# EAGLE board main_board (EAGLE 5.11)
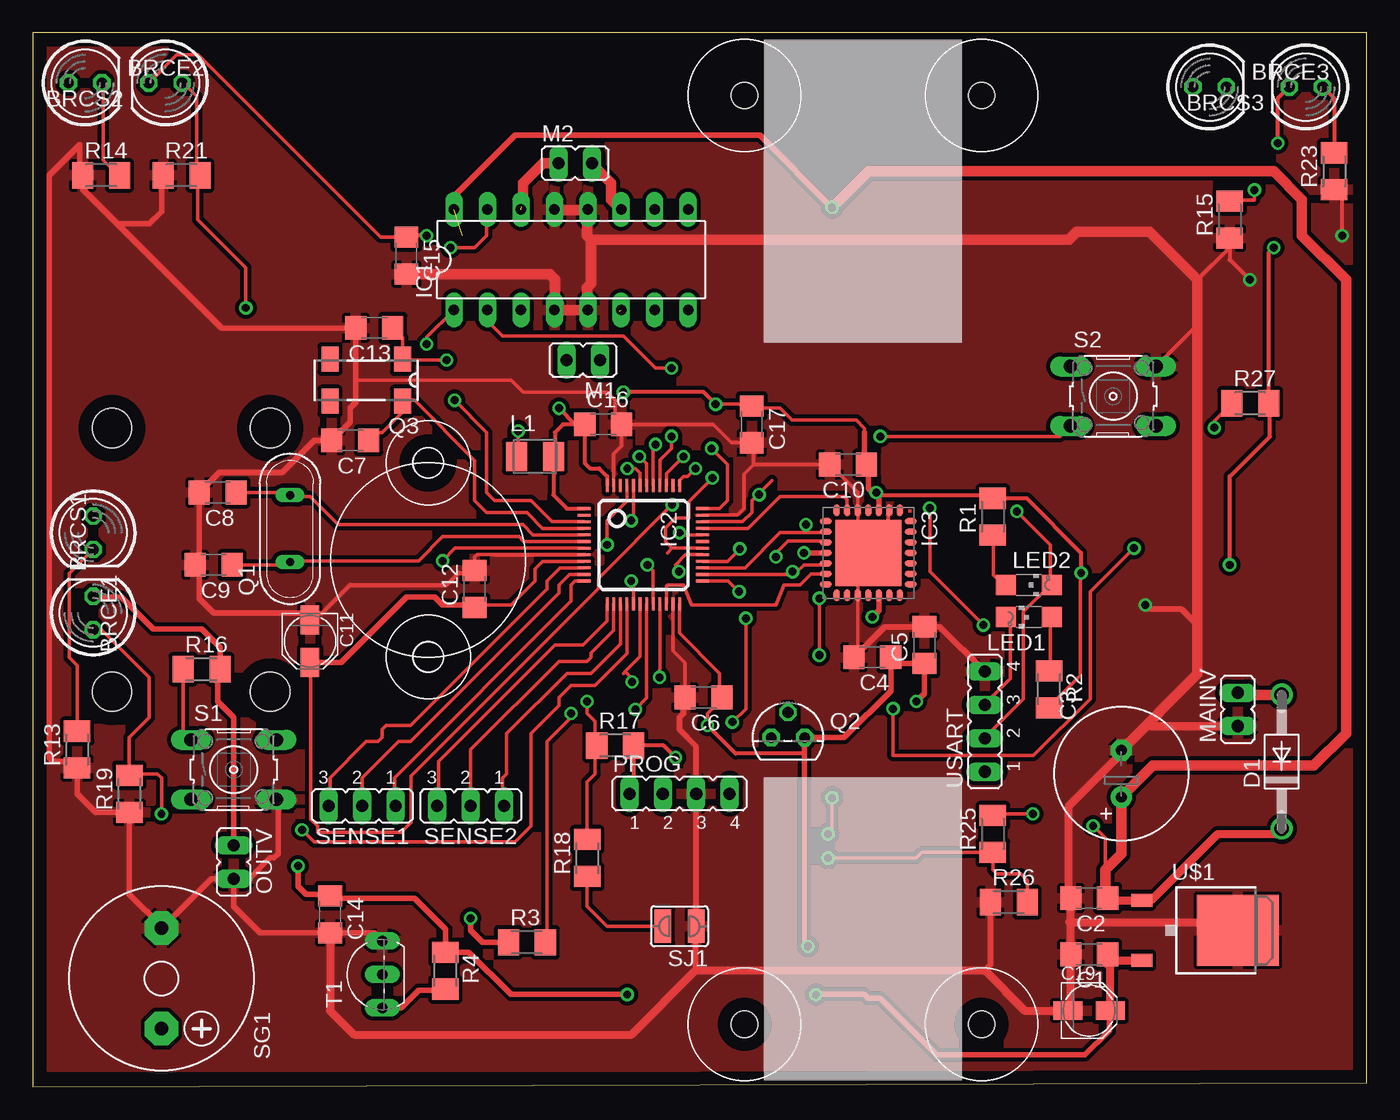
[diagram p0: board, top side]
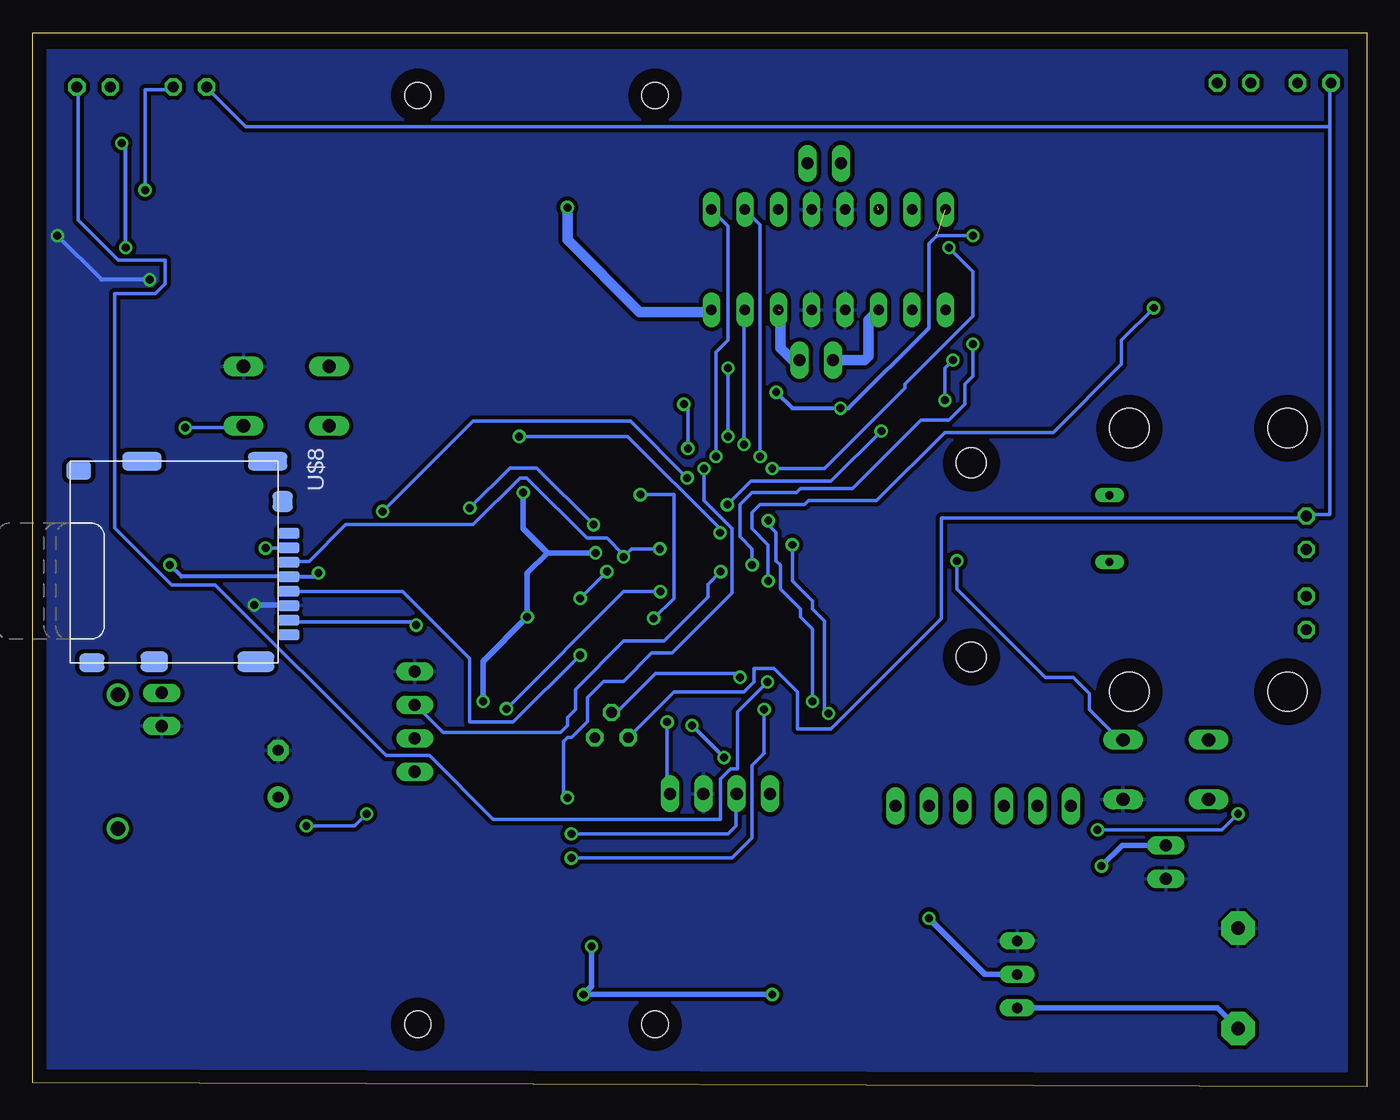
[diagram p1: board, bottom side, seen from below]

Size 101.22 x 80 mm. Coordinates in mm from the lower left corner, seen from the top.
Outline: 0,0 101.22,0.3 101.22,80 0,80 0,0
Copper layers (1*16): Top 0.035mm / dielectric 1.5mm / Bottom 0.035mm
Design rules "default *": minimum track width 10mil, minimum drill 24mil, track to track 10mil, track to pad 10mil, pad to pad 10mil, via to via 10mil, smd to smd 8mil, copper to edge 40mil, drill to drill 8mil, minimum pad ring 10mil, minimum via ring 8mil, stop-mask expansion 4mil, vias tented up to drill 0mil, thermal gap 10mil
Holes 3 mm at 6,50 18,50 6,30 18,30

## Footprints (pad centres in the part's own frame; a part is rotated, then mirrored left to right if it is on the bottom)
LED5MM = drill 0.813 octagon: A -1.27,0; K 1.27,0
C1206 = smd 1.6 x 1.8: 1 -1.4,0; 2 1.4,0
E3,5-10 = drill 0.813 pad 1.6 round: + -1.778,0 | drill 0.813 pad 1.6 octagon: - 1.778,0
PANASONIC_B = smd 2.2 x 1.4: + 1.6,0; - -1.6,0
DO41-10 = drill 1.118 round: A 5.08,0; C -5.08,0
DIL16 = drill 0.813 long: 1 -8.89,-3.81; 2 -6.35,-3.81; 3 -3.81,-3.81; 4 -1.27,-3.81; 5 1.27,-3.81; 6 3.81,-3.81; 7 6.35,-3.81; 8 8.89,-3.81; 9 8.89,3.81; 10 6.35,3.81; 11 3.81,3.81; 12 1.27,3.81; 13 -1.27,3.81; 14 -3.81,3.81; 15 -6.35,3.81; 16 -8.89,3.81
TQFP48 = smd 0.2 x 1: 1 -2.75,-4.5; 2 -2.25,-4.5; 3 -1.75,-4.5; 4 -1.25,-4.5; 5 -0.75,-4.5; 6 -0.25,-4.5; 7 0.25,-4.5; 8 0.75,-4.5; 9 1.25,-4.5; 10 1.75,-4.5; 11 2.25,-4.5; 12 2.75,-4.5; 25 2.75,4.5; 26 2.25,4.5; 27 1.75,4.5; 28 1.25,4.5; 29 0.75,4.5; 30 0.25,4.5; 31 -0.25,4.5; 32 -0.75,4.5; 33 -1.25,4.5; 34 -1.75,4.5; 35 -2.25,4.5; 36 -2.75,4.5 | smd 1 x 0.2: 13 4.5,-2.75; 14 4.5,-2.25; 15 4.5,-1.75; 16 4.5,-1.25; 17 4.5,-0.75; 18 4.5,-0.25; 19 4.5,0.25; 20 4.5,0.75; 21 4.5,1.25; 22 4.5,1.75; 23 4.5,2.25; 24 4.5,2.75; 37 -4.5,2.75; 38 -4.5,2.25; 39 -4.5,1.75; 40 -4.5,1.25; 41 -4.5,0.75; 42 -4.5,0.25; 43 -4.5,-0.25; 44 -4.5,-0.75; 45 -4.5,-1.25; 46 -4.5,-1.75; 47 -4.5,-2.25; 48 -4.5,-2.75
QFPN-28 = smd 0.9 x 0.45: 1 -3.225,2.4; 2 -3.225,1.6; 3 -3.225,0.8; 4 -3.225,0; 5 -3.225,-0.8; 6 -3.225,-1.6; 7 -3.225,-2.4; 15 3.225,-2.4; 16 3.225,-1.6; 17 3.225,-0.8; 18 3.225,0; 19 3.225,0.8; 20 3.225,1.6; 21 3.225,2.4 | smd 0.45 x 0.9: 8 -2.4,-3.225; 9 -1.6,-3.225; 10 -0.8,-3.225; 11 0,-3.225; 12 0.8,-3.225; 13 1.6,-3.225; 14 2.4,-3.225; 22 2.4,3.225; 23 1.6,3.225; 24 0.8,3.225; 25 0,3.225; 26 -0.8,3.225; 27 -1.6,3.225; 28 -2.4,3.225 | smd 5 x 5: TH 0,0
L3230M = smd 1.6 x 2.2: 1 -1.4,0; 2 1.4,0
CHIPLED_1206 = smd 1.5 x 1.5: A 0,-1.75; C 0,1.75
JP1 = drill 0.914 long: 1 0,-1.27; 2 0,1.27
JP4 = drill 0.914 long: 1 -3.81,0; 2 -1.27,0; 3 1.27,0; 4 3.81,0
QS = drill 0.61 long: 1 -2.54,0; 2 2.54,0
TO92 = drill 0.813 octagon: 1 1.27,0; 2 0,1.905; 3 -1.27,0
MC-306 = smd 1.3 x 1.9: 1 -2.75,-1.6; 2 2.75,-1.6; 3 2.75,1.6; 4 -2.75,1.6
M1206 = smd 1.6 x 2: 1 -1.4,0; 2 1.4,0
B3F-10XX = drill 1.016 long: 1 -3.251,2.261; 2 3.251,2.261; 3 -3.251,-2.261; 4 3.251,-2.261
JP2 = drill 0.914 long: 1 -2.54,0; 2 0,0; 3 2.54,0
F/CM12P = drill 1.016 pad 2.54 octagon: + 3.81,0; - -3.81,0
SJW = smd 1.27 x 2.54: 1 -1.27,0; 2 1.27,0
TO92-CBE = drill 0.813 long: B 0,0; C -2.54,0; E 2.54,0
DPAK = smd 1 x 1.6: 1 -2.28,-6.07; 3 2.28,-6.07 | smd 5.4 x 6.2: 2 0,1.23
MICRO_SD_CONNECTOR = smd 0.8 x 1.6: 1 -2.03,8.2; 2 -0.93,8.2; 3 0.17,8.2; 4 1.27,8.2; 5 2.37,8.2; 6 3.47,8.2; 7 4.57,8.2; 8 5.67,8.2 | smd 1.55 x 2.8: 9 7.735,5.7 | smd 1.55 x 2.1: 10 7.735,-2 | smd 1.4 x 1.9: 11 7.81,-6.75; 12 -6.79,-7.75 | smd 1.4 x 3: 13 -7.49,-2.95; 14 -7.49,6.6 | smd 1.6 x 1.55: 15 -4.43,7.725
BALLB = hole 2.286: -7.366,0; 7.366,0
MOTORB = hole 2: -9,7.25; 9,7.25

## Placement (x,y rotation side)
BRCE1  [LED5MM]  4.57,42.06 270 top
BRCE2  [LED5MM]  3.96,76.2 0 top
BRCE3  [LED5MM]  89.31,75.9 0 top
BRCS1  [LED5MM]  4.57,35.97 90 top
BRCS2  [LED5MM]  10.06,76.2 180 top
BRCS3  [LED5MM]  96.62,75.9 180 top
C1  100n  [C1206]  80.16,10.06 180 top
C2  100n  [C1206]  80.16,14.33 180 top
C3  2000uF  [E3,5-10]  82.6,23.77 90 top
C4  100n  [C1206]  63.7,32.61 180 top
C5  100n  [C1206]  67.67,33.53 90 top
C6  100n  [C1206]  50.9,29.57 180 top
C7  6.8p  [C1206]  24.08,49.07 180 top
C8  20p  [C1206]  14.02,45.11 180 top
C9  20p  [C1206]  13.72,39.62 180 top
C10  100n  [C1206]  61.87,47.24 180 top
C11  1u  [PANASONIC_B]  21.03,33.83 270 top
C12  100n  [C1206]  33.53,37.8 90 top
C13  6.8p  [C1206]  25.91,57.61 180 top
C14  100n  [C1206]  22.56,13.11 270 top
C15  100n  [C1206]  28.35,63.09 270 top
C16  100n  [C1206]  43.28,50.29 0 top
C17  100n  [C1206]  54.56,50.29 270 top
C19  1u  [PANASONIC_B]  80.16,5.79 0 top
D1  1N4004  [DO41-10]  94.78,24.69 90 top
IC1  L293D  [DIL16]  40.84,62.79 0 top
IC2  STM32F10XCXT6  [TQFP48]  46.33,41.15 270 top
IC3  LIS3LV02DQ  [QFPN-28]  63.4,40.54 270 top
L1  [L3230M]  38.1,47.85 0 top
LED1  [CHIPLED_1206]  75.59,35.66 90 top
LED2  [CHIPLED_1206]  75.59,38.1 270 top
M1  [JP1]  41.76,55.17 90 top
M2  [JP1]  41.15,70.1 270 top
MAINV  [JP1]  91.44,28.65 0 top
OUTV  [JP1]  15.24,17.07 180 top
PROG  [JP4]  49.07,22.25 0 top
Q1  8Mhz  [QS]  19.51,42.37 90 top
Q2  BC557  [TO92]  57.3,26.52 0 top
Q3  MC-306  [MC-306]  25.3,53.64 180 top
R1  1k  [M1206]  72.85,43.28 90 top
R2  1k  [M1206]  77.11,30.18 270 top
R3  1k  [M1206]  37.49,10.97 0 top
R4  Rbuzz  [M1206]  31.3,8.83 270 top
R13  200  [M1206]  3.35,25.6 90 top
R14  200  [M1206]  5.18,69.19 0 top
R15  200  [M1206]  90.83,65.84 90 top
R16  10k  [M1206]  12.8,31.7 0 top
R17  10k  [M1206]  44.2,25.91 0 top
R18  510  [M1206]  42.06,17.37 90 top
R19  10k  [M1206]  7.32,22.25 90 top
R21  10k  [M1206]  11.28,69.19 0 top
R23  10k  [M1206]  98.76,69.49 90 top
R25  100k  [M1206]  72.85,19.2 90 top
R26  50k  [M1206]  74.07,14.02 0 top
R27  10k  [M1206]  92.39,51.89 0 top
S1  [B3F-10XX]  15.24,24.08 0 top
S2  [B3F-10XX]  81.99,52.43 0 top
SENSE1  [JP2]  24.99,21.34 180 top
SENSE2  [JP2]  33.22,21.34 180 top
SG1  F/CM12P  [F/CM12P]  9.75,8.23 270 top
SJ1  [SJW]  49.07,12.19 180 top
T1  [TO92-CBE]  26.52,8.53 90 top
U$1  LF33CDT  [DPAK]  90.22,11.89 270 top
U$8  MICROSD_SPI_MODE  [MICRO_SD_CONNECTOR]  90,40 270 bottom
U$9  POLOLU952  [BALLB]  30,40 90 top
U$10  POLOLU0993B  [MOTORB]  63,68 0 top
U$11  POLOLU0993B  [MOTORB]  63,12 180 top
USART  [JP4]  72.24,27.74 90 top

## Library data of the parts
BRCE1-BRCE3 BRCS1-BRCS3 LED1 LED2 = led
C1-C17 C19 L1 = rcl
D1 = diode
IC1 = st-microelectronics; MPN: L293D; OC_FARNELL: 9589619; OC_NEWARK: 56P8249
IC2 = stm32
IC3 = st-microelectronics; MF: Arrow Electronics; MPN: LIS3LV02DQ; OC_FARNELL: 1220909; OC_NEWARK: 89K0642
M1 M2 MAINV OUTV PROG SENSE1 SENSE2 SJ1 USART = jumper
Q1 = special
Q2 = transistor-pnp
Q3 = crystal; MPN: MC-306 60.0KHZ 100PPM ,12.5PF; OC_FARNELL: 1278040; OC_NEWARK: 31M5576
R1-R4 R13-R19 R21 R23 R25-R27 = resistor
S1 S2 = switch-omron; MPN: B3F-1000; OC_FARNELL: 176432; OC_NEWARK: 36M3542
SG1 = buzzer; OC_FARNELL: unknown; OC_NEWARK: unknown
T1 = transistor
U$1 U$9-U$11 = robot
U$8 = con-molex-microsd

## Nets
+3V3: BRCS1.K BRCS2.K BRCS3.K C1.1 C4.1 C5.1 C6.1 C10.1 C14.1 C15.1 C16.1 C17.1 C19.+ IC1.16 IC2.1 IC2.24 IC2.36 IC2.48 IC3.3 IC3.11 IC3.19 L1.2 OUTV.1 PROG.1 Q2.1 R1.2 R2.2 R4.1 R16.2 R17.2 R27.2 U$1.3 U$8.4
+7V: C2.1 C3.+ D1.C IC1.8 R25.2 U$1.1
GND: C1.2 C2.2 C3.- C4.2 C5.2 C6.2 C7.2 C8.2 C9.2 C10.2 C11.- C12.2 C13.2 C14.2 C15.2 C16.2 C17.2 C19.- IC1.4 IC1.5 IC1.12 IC1.13 IC2.8 IC2.23 IC2.35 IC2.47 IC3.2 IC3.5 IC3.17 MAINV.1 OUTV.2 PROG.3 R13.1 R14.1 R15.1 R19.1 R21.1 R23.1 R26.1 S1.4 S2.2 SG1.- SJ1.1 T1.E U$1.2 U$8.6 USART.4
N$1: IC1.2 IC2.40
N$2: IC1.7 IC2.41
N$3: IC1.10 IC2.42
N$4: IC1.15 IC2.43
N$5: C9.1 IC2.6 Q1.1
N$6: C8.1 IC2.5 Q1.2
N$7: IC1.1 IC2.20
N$8: IC1.9 IC2.39
N$9: R3.1 T1.B
N$10: R4.2 SG1.+ T1.C
N$11: LED1.A R2.1
N$12: LED2.A R1.1
N$13: IC2.37 PROG.2
N$15: IC2.11 SENSE1.2
N$16: IC2.12 SENSE1.1
N$17: IC2.13 SENSE2.3
N$18: IC2.14 SENSE2.2
N$19: IC2.15 SENSE2.1
N$20: IC2.34 PROG.4
N$21: C11.+ C12.1 IC2.9 L1.1
N$22: IC2.10 SENSE1.3
N$27: IC2.21 Q2.2
N$28: BRCE1.K R13.2
N$29: BRCE2.K R14.2
N$30: BRCE3.K R15.2
N$31: BRCE1.A BRCE2.A BRCE3.A Q2.3
N$32: IC2.26 IC3.12 U$8.5
N$33: IC2.27 IC3.9 U$8.7
N$34: IC2.22 IC3.13
N$35: C13.1 IC2.3 Q3.1
N$36: IC2.25 U$8.2
N$37: IC2.28 IC3.10 U$8.3
N$38: C7.1 IC2.4 Q3.4
N$39: IC2.7 S1.2
N$40: R16.1 S1.1
N$41: IC2.44 R17.1 R18.2
N$42: R18.1 SJ1.2
N$43: D1.A MAINV.2
N$44: BRCS1.A IC2.16 R19.2
N$46: BRCS2.A IC2.17 R21.2
N$47: BRCS3.A IC2.18 R23.2
N$49: IC2.19 R25.1 R26.2
N$50: IC2.30 LED2.C USART.2
N$51: IC2.29 LED1.C USART.3
N$52: R27.1 S2.4
N$53: IC1.3 M1.2
N$54: IC1.6 M1.1
N$55: IC1.14 M2.1
N$56: IC1.11 M2.2
OTHERS1: IC2.33 IC3.6
OTHERS2: IC2.32 S2.3
OTHERS3: IC2.45 R3.2

## Tracks (layer width: path | path; a pad name or v marks a point on that pad's centre or on a via)
+3V3  (via drill 0.6)  (1 unrouted)
  Top 0.254: IC2.24 49.07,34.44 52.12,31.39 52.12,29.75 C6.1 52.3,29.44 51.21,28.35 v51.21,27.43 | 63.09,49.68 63.09,49.99 62.48,50.6 57.61,50.6 56.69,51.51 54.74,51.51 C17.1 54.44,51.82 v51.82,51.82 | IC2.36 52.11,43.9 52.12,43.89 52.73,44.5 52.73,47.24 v51.51,48.46 | R2.2 77.22,28.96 79.5,31.24 79.5,38.86 v79.55,39.01 | BRCS2.K 10.92,78.33 12.55,78.33 26.39,64.49 C15.1
  Top 0.305: v51.21,27.43 53.34,25.3 58.57,25.3 | v48.77,24.99 47.85,25.91 R17.2 45.6,22.58 PROG.1 | 41.15,50.29 C16.1 41.88,47.35 42.29,46.94 42.98,46.94 43.58,46.34 IC2.48 | v39.93,51.51 41.15,50.29 | v44.81,52.73 50.9,52.73 v51.82,51.82 | 41.15,50.29 40.23,50.29 39.62,49.68 39.62,47.98 L1.2 39.5,44.93 40.53,43.9 IC2.1 | IC1.16 31.85,66.6 | v29.87,64.62 28.47,64.62 C15.1 27.86,64.49 | 64.2,44.92 72.61,44.92 R1.2 75.41,44.68 79.55,40.54 v79.55,39.01 | v90.83,39.62 90.83,46.33 93.88,49.38 93.88,50.9 93.27,51.51 93.41,51.51 R27.2 93.79,63.31 v94.18,63.7 | v94.49,71.63 94.49,75.03 BRCS3.K
  Top 0.406: v58.83,10.67 58.57,10.92 58.57,25.3 Q2.1 61.57,26.52 65.1,30.05 C4.1 65.59,32.13 C5.1 67.67,29.87 v67.06,29.26 | v59.44,7.01 63.09,7.01 63.4,6.71 64.31,6.71 68.58,2.44 79.86,2.44 81.69,4.27 81.69,5.71 C19.+ | v45.11,7.01 36.27,7.01 33.05,10.23 R4.1 31.3,11.98 28.96,14.33 22.74,14.33 C14.1 22.43,14.63 20.73,14.63 20.12,15.24 v20.12,16.76 | OUTV.1 15.24,28.04 14.02,29.26 14.02,31.52 R16.2 14.2,33.35 12.8,34.75 9.14,34.75 6.71,37.19 4.62,37.19 BRCS1.K | IC3.19 64.2,36.16 v63.7,35.66 | v58.52,40.54 IC3.11 | IC3.3 64.2,44.92 v64.01,45.11 63.7,45.11 63.4,45.41 63.4,47.12 C10.1 63.09,47.42 63.09,49.68 | IC1.16 31.95,67.61 36.58,72.24 55.17,72.24 60.66,66.75
  Top 0.61: C19.+ 81.76,9.07 81.08,9.75 81.26,9.75 C1.1 82.01,9.61 U$1.3
  Bottom 0.254: v51.51,48.46 51.51,51.51 v51.82,51.82 | v29.87,64.62 32.61,64.62 33.22,64.01 33.22,57.61
  Bottom 0.305: v51.21,27.43 v48.77,24.99 | v44.81,52.73 43.59,51.51 v39.93,51.51 39.32,51.51 33.22,57.61 | v79.55,39.01 79.86,38.71 81.78,38.71 U$8.4 89.94,38.73 v90.83,39.62 | v94.18,63.7 94.18,71.32 v94.49,71.63
  Bottom 0.406: v58.83,10.67 58.83,7.62 v59.44,7.01 v45.11,7.01 | OUTV.1 18.54,18.34 v20.12,16.76 | v67.06,29.26 67.06,32.31 v63.7,35.66 63.7,39.01 62.18,40.54 | 62.18,40.54 v58.52,40.54 | v64.01,45.11 64.01,42.37 62.18,40.54
+7V  (via drill 0.6)
  Top 0.254: 81.38,16.46 81.38,18.9 v80.47,19.81 | v75.89,20.73 72.97,20.73 R25.2
  Top 0.61: C2.1 81.72,14.17 U$1.1 84.88,14.17 89.92,19.2 94.37,19.2 D1.C
  Top 0.813: v60.66,66.75 63.4,69.49 94.18,69.49 96.32,67.36 96.32,64.62 99.67,61.27 99.67,26.82 97.23,24.38 84.99,24.38 C3.+ 82.6,17.68 81.38,16.46 81.38,14.51 C2.1
  Bottom 0.254: v80.47,19.81 76.81,19.81 v75.89,20.73
  Bottom 0.813: v60.66,66.75 60.66,64.31 55.17,58.83 49.89,58.83 IC1.8
GND  (via drill 0.6)
  Top 0.254: C16.2 44.2,50.78 44.2,52.12 43.59,52.73 37.19,52.73 36.27,53.65 24.51,53.65 | C16.2 51.63,50.29 53.03,48.89 C17.2 54.68,48.77 54.68,47.24 | C4.2 62.6,32.91 IC3.17 62.6,41.15 IC3.5 62.6,45.12 C10.2 54.68,47.24 | 72.08,31.7 USART.4 71.66,32.13 | C16.2 44.68,48.64 44.08,48.04 IC2.47 | 54.68,47.24 53.95,46.51 53.95,43.89 53.46,43.4 IC2.35 | 35.04,40.4 33.69,40.4 33.53,40.23 C12.2 | C6.2 49.5,32.19 48.58,33.11 IC2.23
  Top 0.305: 21.11,35.97 21.95,35.97 24.08,38.1 31.39,38.1 32.31,39.01 33.35,39.01 C12.2 | 35.04,40.4 IC2.8 | v92.35,61.27 90.83,62.79 R15.1 90.83,63.7 88.39,61.27 88.39,57.84 S2.2 | v99.36,64.62 99.36,67.48 R23.1 | IC3.2 64.92,43.69 64.92,41.45 64.62,41.15 62.6,41.15
  Top 0.406: 50.29,8.84 50.29,12.14 SJ1.1 PROG.3 50.34,25.86 49.07,27.13 49.07,28.04 49.38,28.35 49.38,29.44 C6.2 | 88.39,31.34 88.39,35.05 87.17,36.27 84.73,36.27 v84.43,36.58 | 72.24,8.84 72.67,9.27 R26.1 | OUTV.2 15.24,13.72 17.25,11.71 C14.2 25.89,11.71 T1.E | OUTV.2 13.51,15.8 SG1.- 9.75,12.19 7.32,14.63 R19.1 4.75,20.85 3.35,22.25 R13.1 3.23,24.69 1.52,24.69 1.22,24.99 1.22,69.19 3.53,71.5 3.53,69.44 R14.1 3.78,68.15 6.4,65.53 | OUTV.2 16.41,15.8 17.98,17.37 18.29,17.37 18.59,17.68 18.59,21.72 S1.4 | 6.4,65.53 8.84,65.53 9.75,66.45 9.75,69.07 R21.1 | 6.4,65.53 14.33,57.61 C13.2 24.51,53.65 24.51,51.94 24.08,51.51 24.08,50.47 C7.2 21.34,49.07 18.9,46.63 14.14,46.63 C8.2 12.62,39.93 | 12.62,39.93 C9.2 | 12.62,39.93 12.62,37.06 13.72,35.97 21.11,35.97 C11.- | C4.2 64.62,34.93 C5.2 68.86,34.93 USART.4
  Top 0.61: MAINV.1 84.43,27.38 C3.- 82.6,25.3 78.64,21.34 78.64,14.45 C2.2 C1.2 | C1.2 78.76,5.99 C19.- 75.29,5.79 72.24,8.84 50.29,8.84 45.41,3.96 24.38,3.96 22.55,5.79 C14.2 | C1.2 78.76,12.37 78.64,12.5 90.84,12.5 U$1.2
  Top 0.813: C3.- 88.39,31.34 88.39,61.27 84.73,64.92 79.25,64.92 78.64,64.31 42.37,64.31 | 42.11,65.79 IC1.12 42.06,66.55 | 42.37,64.31 42.06,64.62 42.06,66.55 | 42.37,64.31 42.37,60.96 42.06,60.66 42.06,59.03 IC1.5 IC1.4 39.93,59.33 39.93,59.44 39.62,59.74 39.62,61.27 39.2,61.69 C15.2 | 42.06,66.55 39.62,66.55 IC1.13
  Bottom 0.305: v92.35,61.27 96.01,61.27 v99.36,64.62
  Bottom 0.406: v84.43,36.58 81.85,36.58 U$8.6
  pour Top (isolate 0.305): 1.22,1.52 100.28,1.52 100.28,78.64 0.91,78.64
  pour Bottom (isolate 0.305): 1.52,78.64 100.28,78.64 100.28,1.22 1.52,1.22
N$1  (via drill 0.6)
  Top 0.254: IC2.40 47.58,47.58 48.46,48.46 v48.46,49.38 | v48.46,54.56 47.24,54.56 44.81,57 35.66,57 34.44,58.22 34.44,58.93 IC1.2
  Bottom 0.254: v48.46,49.38 v48.46,54.56
N$2  (via drill 0.6)
  Top 0.254: IC2.41 47.08,48.6 v47.24,48.77
  Bottom 0.254: v47.24,48.77 47.24,58.93 IC1.7
N$3  (via drill 0.6)
  Top 0.254: IC2.42 46.58,47.3 v46.02,47.85
  Bottom 0.254: v46.02,47.85 46.02,65.43 IC1.10
N$4  (via drill 0.6)
  Top 0.254: IC2.43 46.08,46.58 45.72,46.94 v45.11,46.94 | v31.7,63.7 33.53,63.7 34.44,64.62 34.44,66.55 IC1.15
  Bottom 0.254: v45.11,46.94 41.15,46.94 35.05,53.03 35.05,53.34 29.87,58.52 29.87,61.87 v31.7,63.7
N$5
  Top 0.254: IC2.6 37.24,41.4 36.88,41.76 31.09,41.76 29.26,39.93 19.61,39.93 Q1.1 19.3,39.62 C9.1
N$6
  Top 0.254: IC2.5 37.96,41.9 37.19,42.67 23.16,42.67 21.03,44.81 19.61,44.81 Q1.2 19.3,45.11 C8.1
N$7  (via drill 0.6)
  Top 0.254: IC2.20 47.08,39.18 v46.63,39.62 | v29.87,56.39 29.87,56.9 IC1.1
  Bottom 0.254: v46.63,39.62 46.63,40.84 47.55,41.76 47.55,44.2 46.63,45.11 43.28,45.11 42.98,45.41 39.01,45.41 33.83,50.6 31.7,50.6 30.48,51.82 30.48,53.34 29.87,53.95 v29.87,56.39
N$8  (via drill 0.6)
  Top 0.254: IC2.39 48.08,46.56 v49.38,47.85
  Bottom 0.254: v49.38,47.85 49.38,55.78 48.46,56.69 48.46,65.33 IC1.9
N$9  (via drill 0.6)
  Top 0.406: v33.22,12.8 33.22,11.89 34.14,10.97 R3.1
  Bottom 0.406: T1.B 28.96,8.53 v33.22,12.8
N$10
  Top 0.406: T1.C 27.94,5.99 29.26,7.32 31.19,7.32 R4.2
  Bottom 0.406: T1.C 11.33,5.99 SG1.+
N$11
  Top 0.254: LED1.A 77.22,35.56 77.22,31.75 R2.1
N$12
  Top 0.254: LED2.A 73.66,38.1 72.9,38.86 72.9,41.66 R1.1
N$13  (via drill 0.6)
  Top 0.254: IC2.37 49.08,46.03 49.38,46.33 49.68,46.33 v50.29,46.94 | v60.66,21.95 60.66,19.51 v60.35,19.2
  Bottom 0.254: v50.29,46.94 50.29,44.5 48.16,42.37 48.16,37.49 52.73,32.92 54.25,32.92 56.39,30.79 57.91,30.79 59.13,29.57 59.13,27.74 60.35,26.52 60.66,26.52 60.96,26.21 60.96,22.25 v60.66,21.95 | v60.35,19.2 48.46,19.2 47.85,19.81 47.85,21.64 48.16,21.95 48.11,21.95 PROG.2
N$15
  Top 0.254: IC2.11 40.73,38.9 39.93,38.1 39.93,37.49 28.65,26.21 27.74,26.21 24.99,23.47 SENSE1.2
N$16
  Top 0.254: IC2.12 41.14,38.4 40.84,38.1 40.84,36.88 27.43,23.47 27.43,21.44 SENSE1.1
N$17
  Top 0.254: IC2.13 43.58,35.36 43.59,35.36 41.76,33.53 39.62,33.53 30.79,24.69 30.79,21.44 SENSE2.3
N$18
  Top 0.254: IC2.14 44.08,34.63 42.37,32.92 42.37,32.61 42.06,32.31 39.93,32.31 33.22,25.6 SENSE2.2
N$19
  Top 0.254: IC2.15 44.58,33.61 42.37,31.39 40.54,31.39 35.97,26.82 35.97,23.77 35.66,23.47 35.66,21.44 SENSE2.1
N$20  (via drill 0.61)
  Top 0.254: IC2.34 53.87,42.9 54.56,43.59 54.56,44.5 55.07,45.01 | 55.07,45.01 56.08,46.02 | v53.09,27.69 54.1,28.7 v54.1,35.56 | v55.12,44.96 55.07,45.01
  Bottom 0.254: v53.09,27.69 53.09,22.35 PROG.4 | v54.1,35.56 52.58,37.08 52.58,44.96 v55.12,44.96
N$21  (via drill 0.61)
  Top 0.254: IC2.9 38.68,39.9 38.1,39.32 38.1,38.41 36.27,36.58 33.71,36.58 C12.1 | v36.83,49.78 36.83,48.01 L1.1 | v48.51,44.2 42.93,38.61 42.93,37.85 28.7,23.62 28.7,20.07 27.94,19.3 21.59,19.3 21.59,19.81 21.08,20.32 21.08,32 C11.+
  Top 0.406: C11.+ 23.39,32.23 28.35,37.19 30.48,37.19 31.09,36.58 33.35,36.58 C12.1
  Bottom 0.254: v36.83,49.78 40.64,45.97 46.74,45.97 v48.51,44.2
N$22
  Top 0.254: IC2.10 40.01,39.4 39.01,38.41 39.01,37.8 28.65,27.43 26.82,27.43 26.52,27.13 26.52,26.52 26.21,26.21 25.3,26.21 22.55,23.47 22.55,21.44 SENSE1.3
N$27  (via drill 0.6)
  Top 0.254: IC2.21 47.58,32.34 v47.55,31.09
  Bottom 0.254: v47.55,31.09 47.85,31.39 53.95,31.39 56.92,28.42 Q2.2
N$28
  Top 0.254: R13.2 3.35,32 2.74,32.61 2.74,38.96 BRCE1.K
N$29
  Top 0.254: R14.2 6.35,69.34 5.33,70.36 5.33,76.2 BRCE2.K
N$30  (via drill 0.61)
  Top 0.254: v92.71,68.07 92.71,67.31 90.93,67.31 R15.2
  Bottom 0.254: v92.71,68.07 92.71,75.69 90.68,75.69 BRCE3.K
N$31
  Bottom 0.254: Q2.3 52.58,29.97 47.24,29.97 46.48,30.73 46.48,31.75 44.96,31.75 43.18,29.97 43.18,27.18 40.64,27.18 32.26,35.56 32.26,43.18 4.57,43.18 BRCE1.A 4.57,43.43 2.79,43.43 2.79,72.9 | 2.79,72.9 2.79,76.2 BRCE2.A | 2.79,72.9 85.09,72.9 87.88,75.69 BRCE3.A
N$32  (via drill 0.61)
  Top 0.254: IC3.12 60.06,39.62 58.52,39.62 57.96,39.06 | 57.96,39.06 57.8,38.9 IC2.26 | v59.69,37.08 v59.69,32.77 | v57.66,39.12 57.91,39.12 57.96,39.06
  Bottom 0.254: v59.69,32.77 64.77,27.69 68.07,27.69 68.07,32.51 73.15,37.59 81.79,37.59 U$8.5 | v57.66,39.12 v59.69,37.08
N$33  (via drill 0.61)
  Top 0.254: IC2.27 54.03,39.4 56.69,42.06 58.67,42.06 | 58.67,42.06 60.1,42.06 IC3.9 | v72.14,35.05 68.07,39.12 v68.07,43.94 | 58.67,42.06 v58.67,42.67
  Bottom 0.254: v72.14,35.05 72.39,35.31 81.79,35.31 U$8.7 | v68.07,43.94 65.02,46.99 62.99,46.99 v58.67,42.67
N$34
  Top 0.254: IC2.22 48.08,38.02 48.16,38.1 49.38,38.1 49.99,36.58 56.39,36.58 57,38.1 58.22,38.1 59.05,38.94 IC3.13 60.1,39.01
N$35  (via drill 0.6)
  Top 0.254: IC2.3 39.4,42.9 37.8,44.5 35.05,44.5 34.44,45.11 34.44,49.68 v32,52.12 | v31.39,55.17 28.12,55.17 Q3.1 28.05,56.87 C13.1
  Bottom 0.254: v32,52.12 32,54.56 v31.39,55.17
N$36  (via drill 0.61)
  Top 0.254: IC2.25 52.74,38.4 53.57,37.57 | 53.57,37.57 53.65,37.49 | v83.57,40.89 80.26,37.59 80.26,29.46 75.95,25.15 65.28,25.15 v65.28,28.7 | v53.59,37.59 53.57,37.57
  Bottom 0.254: v83.57,40.89 82.04,40.89 U$8.2 | v65.28,28.7 56.39,37.59 v53.59,37.59
N$37  (via drill 0.6)
  Top 0.254: IC2.28 52.7,39.9 v53.65,40.84 | v56.39,40.23 56.39,40.54 57.3,41.45 60.06,41.45 IC3.10
  Bottom 0.254: v53.65,40.84 55.78,40.84 v56.39,40.23 56.39,40.39 57.66,41.66 59.18,41.66 63.75,46.23 64.26,46.23 67.82,42.67 77.47,42.67 80.26,39.88 81.79,39.88 U$8.3
N$38
  Top 0.254: IC2.4 38.68,42.4 37.49,43.59 34.44,43.59 33.53,44.5 33.53,47.55 28.96,52.12 28.12,52.12 Q3.4 28.05,51.21 26.52,49.68 26.09,49.68 C7.1
  Top 0.406: C7.1 25.48,49.48
N$39  (via drill 0.6)
  Top 0.254: IC2.7 32.06,40.9 v31.09,39.93
  Bottom 0.254: v31.09,39.93 31.09,37.8 24.38,31.09 22.25,31.09 21.03,29.87 21.03,28.65 18.82,26.44 18.59,26.44 S1.2
N$40
  Top 0.254: R16.1 11.4,26.93 S1.1
N$41  (via drill 0.6)
  Top 0.254: R18.2 42.06,23.16 42.67,23.77 42.67,25.78 R17.1 42.67,26.03 42.67,27.74 42.06,28.35 v42.06,29.26 | IC2.44 45.58,43.14 v45.41,42.98
  Bottom 0.254: v45.41,42.98 45.41,42.67 44.81,42.06 44.81,39.93 44.5,39.62 44.5,37.8 42.98,36.27 42.98,35.66 42.06,34.75 v42.06,29.26
N$42
  Top 0.254: SJ1.2 43.59,12.19 42.06,13.72 R18.1
N$43
  Top 0.813: MAINV.2 91.59,29.77 D1.A
N$44  (via drill 0.6)
  Top 0.254: IC2.16 45.08,32.89 42.67,30.48 40.84,30.48 39.93,29.57 39.93,28.96 37.8,26.82 37.8,19.81 36.58,18.59 21.34,18.59 v20.42,19.51 | v9.75,20.73 9.75,23.47 9.45,23.77 7.44,23.77 R19.2 7.32,26.52 8.84,28.04 8.84,31.09 5.23,34.7 BRCS1.A
  Bottom 0.254: v20.42,19.51 10.97,19.51 v9.75,20.73
N$46  (via drill 0.6)
  Top 0.254: IC2.17 45.58,38.24 v45.41,38.41 | v16.15,59.13 16.15,62.18 12.5,65.84 12.5,69.01 R21.2 12.45,69.34 12.45,75.18 11.43,76.2 BRCS2.A
  Bottom 0.254: v45.41,38.41 45.41,41.15 46.63,42.37 46.63,43.59 46.02,44.2 42.67,44.2 42.37,44.5 37.19,44.5 32,49.68 23.77,49.68 18.59,54.86 18.59,56.69 v16.15,59.13
N$47  (via drill 0.61)
  Top 0.254: IC2.18 46.08,32.67 44.93,31.52 | 44.93,31.52 44.81,31.39 | v45.47,30.73 45.47,30.99 44.93,31.52
  Top 0.305: R23.2 98.75,75.03 BRCS3.A
  Bottom 0.254: v45.47,30.73 47.75,28.45 47.75,24.13 48.26,24.13 49.02,23.37 49.02,20.32 66.29,20.32 71.12,25.15 74.42,25.15 87.38,38.1 90.68,38.1 95,42.42 95,60.2 91.95,60.2 91.19,60.96 91.19,62.74 94.74,62.74 97.79,65.79 97.79,75.69 BRCS3.A
N$49  (via drill 0.6)
  Top 0.254: R26.2 75.47,15.67 74.98,16.15 73.15,16.15 72.85,16.46 R25.1 67.48,17.8 67.06,17.37 v60.35,17.37 | IC2.19 46.58,29.51 v45.72,28.65
  Bottom 0.254: v45.72,28.65 45.72,25.3 46.63,24.38 46.63,18.9 48.16,17.37 v60.35,17.37
N$50  (via drill 0.61)
  Top 0.254: IC2.30 48.52,40.9 48.51,40.89 | 48.16,40.54 48.51,40.89 | 77.22,38.1 75.18,36.07 75.18,29.46 72.39,26.67 USART.2 | 48.51,40.89 48.01,41.4 48.01,42.42 48.77,43.18 49.78,43.18 49.78,44.45 v51.56,46.23 | v74.68,43.69 77.22,41.15 77.22,38.1 | 77.22,38.1 LED2.C
  Bottom 0.254: v51.56,46.23 55.88,50.55 67.82,50.55 v74.68,43.69
N$51  (via drill 0.61)
  Top 0.254: IC2.29 49.54,40.4 48.77,39.62 49.02,39.37 v49.02,39.12 | LED1.C 73.91,35.56 74.17,35.31 74.17,30.99 72.39,29.21 USART.3
  Bottom 0.254: USART.3 72.14,28.96 70.1,26.92 61.16,26.92 60.66,27.43 60.66,28.04 60.05,28.65 60.05,30.18 56.39,33.83 53.34,33.83 49.99,37.19 49.99,38.15 v49.02,39.12
N$52  (via drill 0.61)
  Top 0.254: v89.66,50.04 89.66,50.55 90.93,51.82 R27.1
  Bottom 0.254: v89.66,50.04 85.34,50.04 S2.4
N$53
  Bottom 0.813: IC1.3 37.8,58.22 37.8,55.47 38.1,55.17 M1.2
N$54  (1 unrouted)
  Bottom 0.813: 44.45,58.93 44.5,58.88 44.5,56.08 43.59,55.17 M1.1
N$55  (1 unrouted)
  Top 0.813: 37.08,66.8 37.19,66.9 37.19,68.58 38.71,70.1 M2.1
N$56
  Top 0.813: IC1.11 43.89,67.36 43.89,68.58 42.42,70.05 M2.2
OTHERS1
  Top 0.254: IC2.33 54.28,42.4 56.69,44.81 61.57,44.81 61.8,44.58 IC3.6
OTHERS2  (via drill 0.6)
  Top 0.254: IC2.32 49.24,41.9 v49.07,42.06 | v64.31,49.38 77.95,49.38 S2.3
  Bottom 0.254: v49.07,42.06 49.07,42.37 56.08,49.38 v64.31,49.38
OTHERS3  (via drill 0.6)
  Top 0.254: IC2.45 45.08,44.47 43.59,42.98 v43.59,41.15 | v40.84,28.35 40.84,28.04 39.01,26.21 39.01,11.1 R3.2
  Bottom 0.254: v43.59,41.15 43.59,38.41 42.06,36.88 42.06,36.27 41.15,35.36 41.15,28.65 v40.84,28.35